# Altium PCB PCB_Dual OPN MegaMod_2021-11-08.pcbdoc
Units mil, origin at the board's own origin, x right, y up, seen from the top; angles counter-clockwise.
Board outline 4675 x 4340 mil, 2 copper layers (Top Layer, Bottom Layer); 73 components, 73 nets, 308 pads, 10 vias.
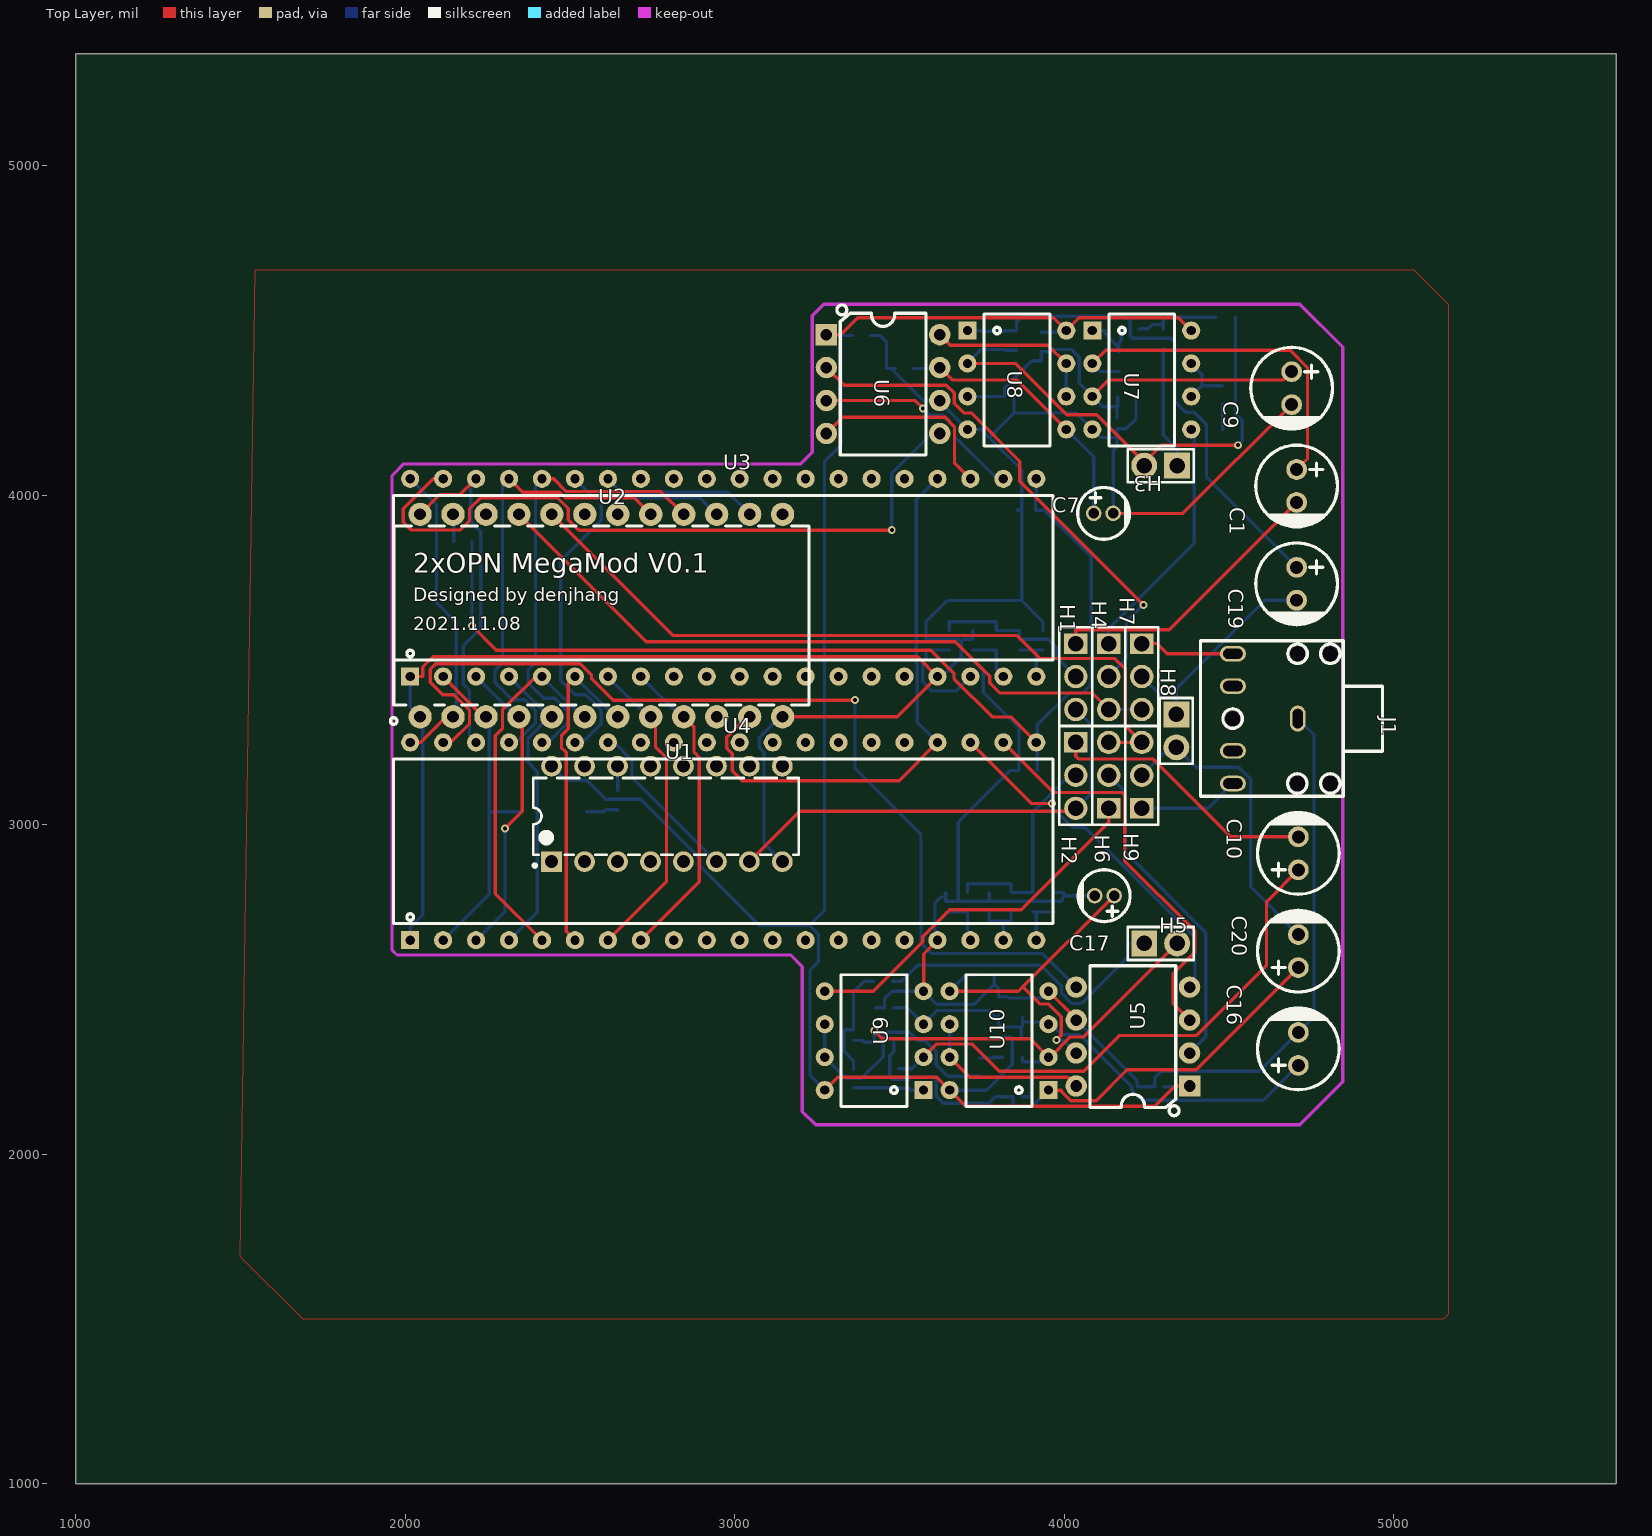
[diagram p0: Top Layer view]
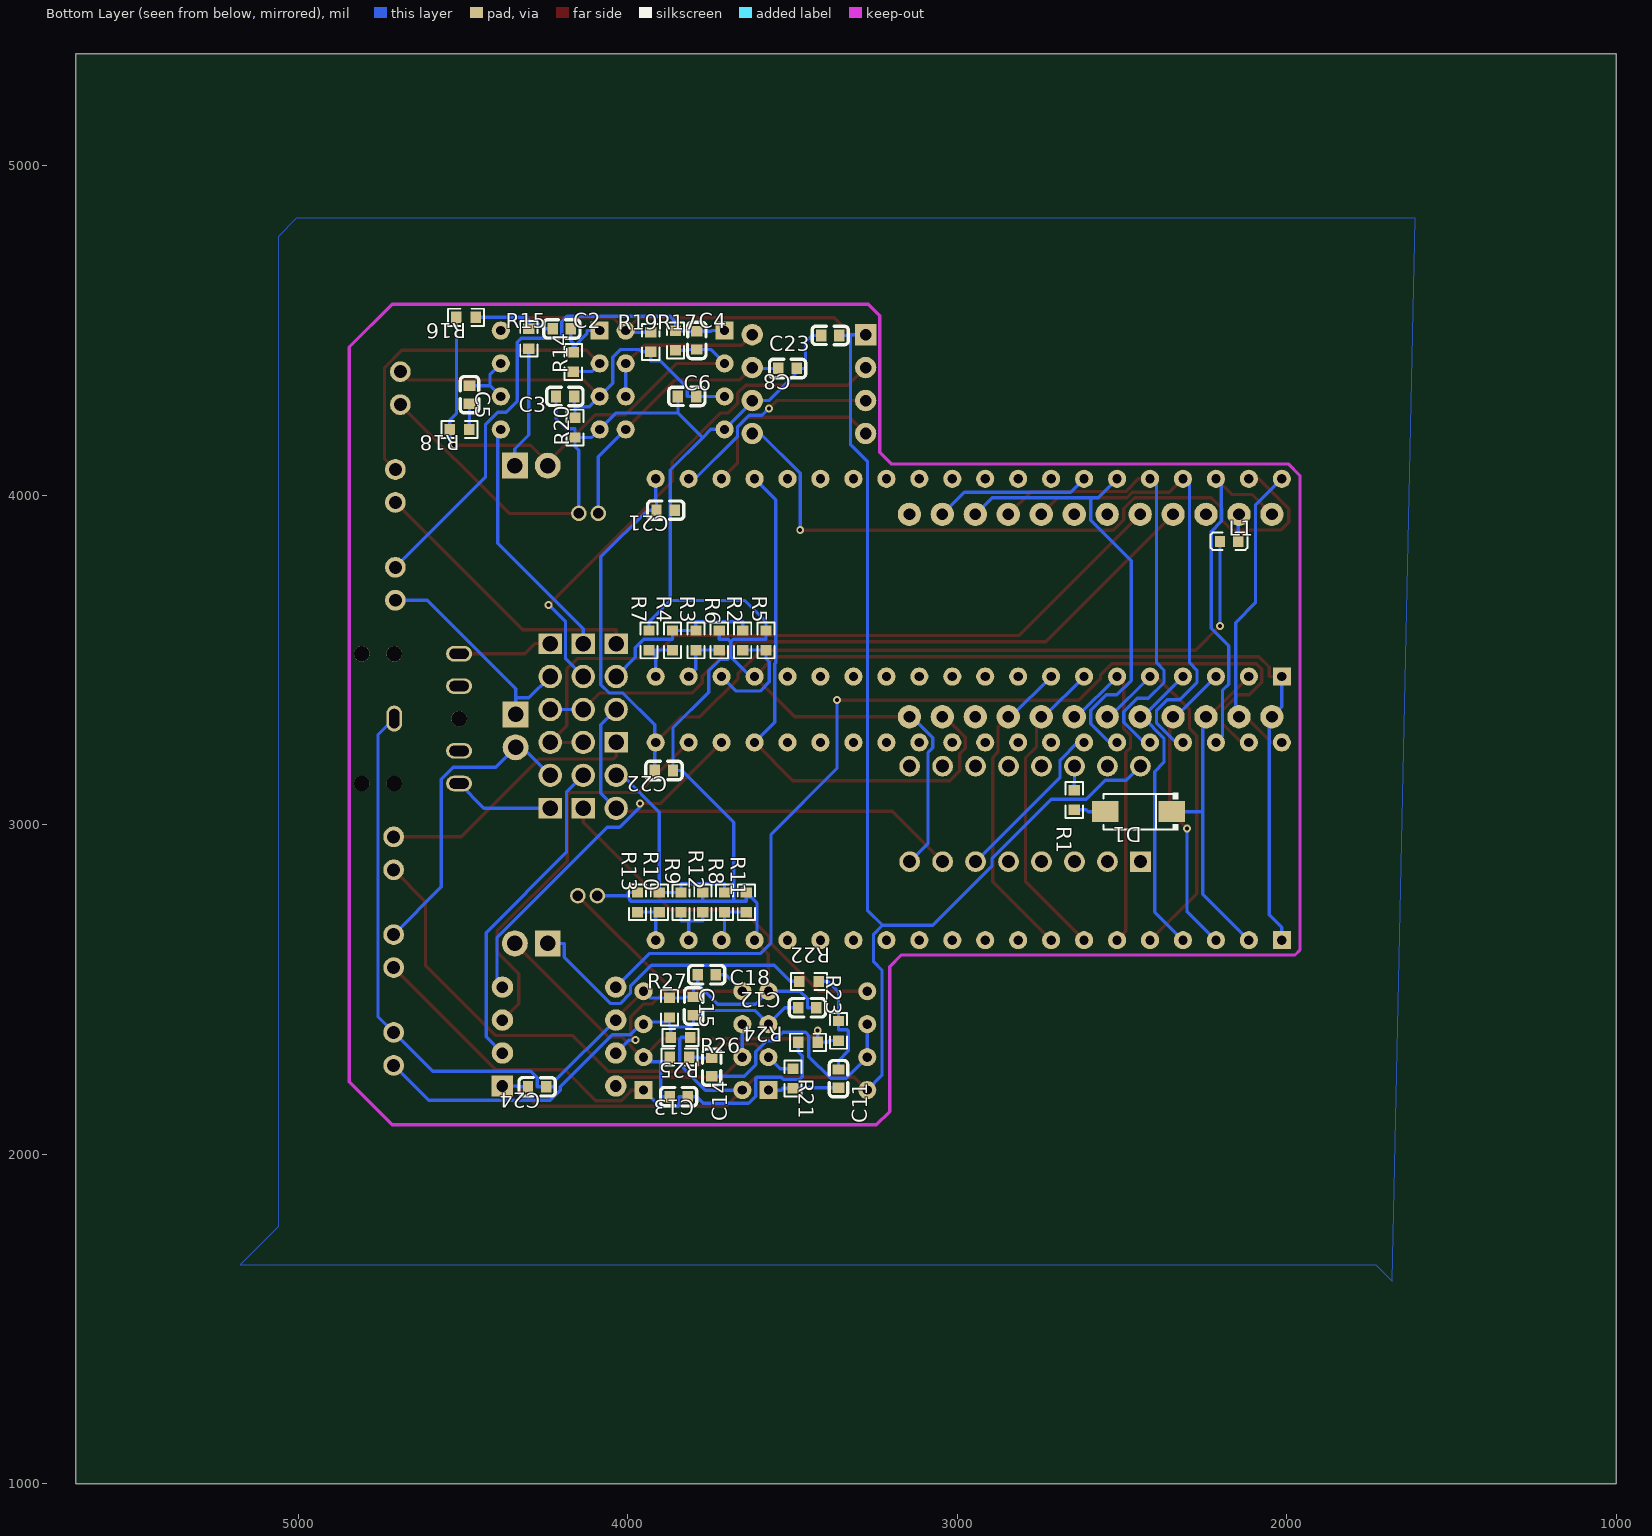
[diagram p1: Bottom Layer view, seen from below]

## Layer stack, top to bottom
Top Layer: signal copper (thickness not stored)
Dielectric: dielectric 12.6, FR-4, Dk 4.8
Bottom Layer: signal copper (thickness not stored)

## Board outline
5675,1000 1000,1000 1000,5340 5675,5340

## Components (designator, comment, footprint, x,y, rotation, side; value= is the part's Value field where it differs from the comment)
C1 "4.7uF" CAP-TH_BD6.3-P2.50-D1.0-FD 4705,4028.24 r270 top
C2 "4.7u" C0603 4200,4505 r180 bottom
C3 "0.1u" C0603 4190,4300 r0 bottom
C4 "10n" C0603 3790,4470 r270 bottom
C5 "4.7u" C0603 4480,4305 r90 bottom
C6 "0.1u" C0603 3820,4300 r0 bottom
C7 "10uF" CAP-TH_BD4.0-P1.50-D0.8-FD 4118.54,3945 r0 top
C8 "0.1u" C0603 3515,4385 r180 bottom
C9 "10uF" CAP-TH_BD6.3-P2.50-D1.0-FD 4690,4325 r270 top
C10 "4.7uF" CAP-TH_BD6.3-P2.50-D1.0-FD 4710,2913.52 r90 top
C11 "4.7u" C0603 3360,2230 r270 bottom
C12 "0.1u" C0603 3455,2445 r180 bottom
C13 "10n" C0603 3845,2175 r0 bottom
C14 "4.7u" C0603 3745,2265 r270 bottom
C15 "0.1u" C0603 3800,2450 r90 bottom
C16 "10uF" CAP-TH_BD6.3-P2.50-D1.0-FD 4710,2320 r90 top
C17 "10uF" CAP-TH_BD4.0-P1.50-D0.8-FD 4121.46,2785 r180 top
C18 "0.1u" C0603 3760,2545 r0 bottom
C19 "4.7uF" CAP-TH_BD6.3-P2.50-D1.0-FD 4705,3731.49 r270 top
C20 "4.7uF" CAP-TH_BD6.3-P2.50-D1.0-FD 4710,2616.76 r90 top
C21 "0.1u" C0603 3885,3955 r180 bottom
C22 "0.1u" C0603 3890,3165 r180 bottom
C23 "0.1u" C0603 3385,4485 r0 bottom
C24 "0.1u" C0603 4275,2205 r180 bottom
D1 "SS14" SMA_L4.4-W2.8-LS5.4-RD 2450,3040 r180 bottom
H1 "Header-Male-2.54_1x3" HDR-TH_3P-P2.54-V-M-1 4035,3450 r270 top
H2 "Header-Male-2.54_1x3" HDR-TH_3P-P2.54-V-M-1 4035,3150 r270 top
H3 "X6511WV-02H-C30D60" HDR-TH_2P-P2.54-V-M 4292.5,4090 r180 top
H4 "Header-Male-2.54_1x3" HDR-TH_3P-P2.54-V-M-1 4135,3450 r270 top
H5 "X6511WV-02H-C30D60" HDR-TH_2P-P2.54-V-M 4292.5,2640 r0 top
H6 "Header-Male-2.54_1x3" HDR-TH_3P-P2.54-V-M-1 4135,3150 r90 top
H7 "Header-Male-2.54_1x3" HDR-TH_3P-P2.54-V-M-1 4235,3450 r270 top
H8 "X6511WV-02H-C30D60" HDR-TH_2P-P2.54-V-M 4340,3285 r270 top
H9 "Header-Male-2.54_1x3" HDR-TH_3P-P2.54-V-M-1 4235,3150 r90 top
J1 "PJ-307C" AUDIO-TH_PJ307C 4610,3322.28 r270 top
L1 "100Ω" L0603 2175,3860 r0 bottom
R1 "1k" R0603 2645,3075 r90 bottom
R2 "10k" R0603 3651,3560 r90 bottom
R3 "10k" R0603 3793,3560 r90 bottom
R4 "10k" R0603 3864,3560 r90 bottom
R5 "1k" R0603 3580,3560 r90 bottom
R6 "1k" R0603 3722,3560 r90 bottom
R7 "1k" R0603 3935,3560 r90 bottom
R8 "10k" R0603 3706,2765 r90 bottom
R9 "10k" R0603 3838,2765 r90 bottom
R10 "10k" R0603 3904,2765 r90 bottom
R11 "1k" R0603 3640,2765 r90 bottom
R12 "1k" R0603 3772,2765 r90 bottom
R13 "1k" R0603 3970,2765 r90 bottom
R14 "3.3k" R0603 4165,4405 r270 bottom
R15 "5.6k" R0603 4300,4475 r90 bottom
R16 "10k" R0603 4490,4540 r180 bottom
R17 "3.6k" R0603 3855,4470 r270 bottom
R18 "3.6k" R0603 4510,4200 r180 bottom
R19 "1k" R0603 3930,4465 r270 bottom
R20 "1k" R0603 4160,4205 r270 bottom
R21 "3.3k" R0603 3498,2230 r90 bottom
R22 "5.6k" R0603 3450,2525 r180 bottom
R23 "10k" R0603 3360,2375 r90 bottom
R24 "3.6k" R0603 3453,2340 r180 bottom
R25 "3.6k" R0603 3843,2295 r180 bottom
R26 "1k" R0603 3840,2355 r0 bottom
R27 "1k" R0603 3873,2445 r90 bottom
U1 "MegaGRRL IC-DCSG" DIP-16_L20.4-W5.8-P2.54-LS7.6-BL 2794.17,3032.99 r0 top
U2 "MegaGRRL IC-FM" DIP-24_L32.0-W13.8-P2.54-LS15.6-BL 2595,3635 r0 top
U3 "YM2203C" DIP40 2965,3750 r0 top
U4 "YM2203C" DIP40 2965,2950 r0 top
U5 "YM3014B" DIP8-2.54-10.9X6.6MM 4208,2357.5 r90 top
U6 "YM3014B" DIP8-2.54-10.9X6.6MM 3450,4337.5 r270 top
U7 "SA5532AP" DIP8 4235,4350 r270 top
U8 "SA5532AP" DIP8 3856,4350 r270 top
U9 "SA5532AP" DIP8 3423,2345 r90 top
U10 "SA5532AP" DIP8 3802,2345 r90 top

## Footprints (in the part's own frame and the unit in brackets; to place one, negate y for a bottom-side part, rotate by r counter-clockwise, add the part's x,y. Pads: shape width x height; smd on the part's side, far side on the other; paste and mask are expansions set on the pad)
AUDIO-TH_PJ307C [mm]
  oval 2x1.2 hole 0.8 slot 1.5 at 0 deg: 1(0,2.5)
  oval 1.2x2 hole 0.8 slot 1.5 at 90 deg: 2(5,-2.5) 3(2.489,-2.5) 4(-2.511,-2.5) 5(-5,-2.5)
  round 1.2 hole 1.2 unplated: ""(-5,2.5) ""(-5,5) ""(0,-2.5) ""(5,2.5) ""(5,5)
  silkscreen extent -6.01,-4.99 5.99,9.03
C0603 [mm]
  rect 0.8x0.9 smd: 1(0.7,0) 2(-0.7,0)
  silkscreen extent -1.39,-0.72 1.41,0.71
CAP-TH_BD4.0-P1.50-D0.8-FD [mm]
  round 1.2 hole 0.8: 1(-0.75,0) 2(0.75,0)
  silkscreen extent -1.98,-2 2.06,2
CAP-TH_BD6.3-P2.50-D1.0-FD [mm]
  round 1.6 hole 1: 1(-1.27,0) 2(1.27,0)
  silkscreen extent -3.15,-3.15 3.17,3.15
DIP8 [mil]
  rect 55x55 hole 28: 1(-150,-150)
  round 55 hole 28: 2(-50,-150) 3(50,-150) 4(150,-150) 5(150,150) 6(50,150) 7(-50,150) 8(-150,150)
  silkscreen extent -200,-100 200,100
DIP8-2.54-10.9X6.6MM [mil]
  rect 65x65 hole 35: 1(-150,-172)
  round 65 hole 35: 2(-50,-172) 3(50,-172) 4(150,-172) 5(150,172) 6(50,172) 7(-50,172) 8(-150,172)
  silkscreen extent -240,-140 215,130
DIP40 [mil]
  rect 55x55 hole 28: 1(-950,-300)
  round 55 hole 28: 2(-850,-300) 3(-750,-300) 4(-650,-300) 5(-550,-300) 6(-450,-300) 7(-350,-300) 8(-250,-300) 9(-150,-300) 10(-50,-300) 11(50,-300) 12(150,-300) 13(250,-300) 14(350,-300) 15(450,-300) 16(550,-300) 17(650,-300) 18(750,-300) 19(850,-300) 20(950,-300) 21(950,300) 22(850,300) 23(750,300) 24(650,300) 25(550,300) 26(450,300) 27(350,300) 28(250,300) 29(150,300) 30(50,300) 31(-50,300) 32(-150,300) 33(-250,300) 34(-350,300) 35(-450,300) 36(-550,300) 37(-650,300) 38(-750,300) 39(-850,300) 40(-950,300)
  silkscreen extent -1000,-250 1000,250
DIP-16_L20.4-W5.8-P2.54-LS7.6-BL [mm]
  rect 1.6x1.6 hole 1: 1(-8.89,-3.68)
  round 1.6 hole 1: 2(-6.35,-3.68) 3(-3.81,-3.68) 4(-1.27,-3.68) 5(1.27,-3.68) 6(3.81,-3.68) 7(6.35,-3.68) 8(8.89,-3.68) 9(8.89,3.68) 10(6.35,3.68) 11(3.81,3.68) 12(1.27,3.68) 13(-1.27,3.68) 14(-3.81,3.68) 15(-6.35,3.68) 16(-8.89,3.68)
  silkscreen extent -10.31,-4.1 10.16,2.77
DIP-24_L32.0-W13.8-P2.54-LS15.6-BL [mm]
  round 1.8 hole 0.9: 1(-13.97,-7.8) 2(-11.43,-7.8) 3(-8.89,-7.8) 4(-6.35,-7.8) 5(-3.81,-7.8) 6(-1.27,-7.8) 7(1.27,-7.8) 8(3.81,-7.8) 9(6.35,-7.8) 10(8.89,-7.8) 11(11.43,-7.8) 12(13.97,-7.8) 13(13.97,7.8) 14(11.43,7.8) 15(8.89,7.8) 16(6.35,7.8) 17(3.81,7.8) 18(1.27,7.8) 19(-1.27,7.8) 20(-3.81,7.8) 21(-6.35,7.8) 22(-8.89,7.8) 23(-11.43,7.8) 24(-13.97,7.8)
  silkscreen extent -16.26,-8.38 16,6.9
HDR-TH_2P-P2.54-V-M [mm]
  rect 2x2 hole 1.2: 1(-1.27,0)
  round 2 hole 1.2: 2(1.27,0)
  silkscreen extent -2.54,-1.27 2.54,1.27
HDR-TH_3P-P2.54-V-M-1 [mm]
  rect 1.575x1.8 hole 1.2: 1(-2.54,0)
  round 1.8 hole 1.2: 2(0,0) 3(2.54,0)
  silkscreen extent -3.81,-1.27 3.81,1.27
L0603 [mm]
  rect 0.8x0.864 smd: 1(-0.7,0) 2(0.7,0)
  silkscreen extent -1.41,-0.67 1.42,0.65
R0603 [mil]
  rect 31.75x34.02 smd: 1(29.66,0) 2(-29.66,0)
  silkscreen extent -55,-26 55,26
SMA_L4.4-W2.8-LS5.4-RD [mm]
  rect 2.046x1.62 smd: 1(2.566,0) 2(-2.565,0)
  silkscreen extent -2.7,-1.44 3.08,1.44

## Via types
v1: diameter 24.02, hole 12.01, Top Layer to Bottom Layer, 10 vias

## Nets (pads, with @x,y where several pads share a name; then routed paths per layer and width w, separated by ;. In a path a pad name is that pad's centre, name@x,y a point inside that pad or via, vN(x,y) a via of type N, cw(c..) or ccw(c..) an arc to the next point about the centre after c; other vN are vias at no path point)
+5V: L1.1 U2.23 | length 83.1
  Bottom Layer w10: U2.23 2147.44,3939.65 L1.1
/CS1: U2.14 U3.34 | length 474.7
  Bottom Layer w10: U3.34 2656.06,4008.94 2978.15,4008.94 U2.14
/CS2: U1.6 U4.34 | length 509.2
  Bottom Layer w10: U4.34 2633.69,3250 2687.83,3195.86 2687.83,3144.45 U1.6
/IC: U2.11 U3.24 U4.24 | length 1740.1
  Top Layer w10: U2.11 3037.92,3327.91 2975.4,3265.39 2975.4,3232.76 2992.54,3215.62 2992.54,3163.99 3022.65,3133.88 3498.88,3133.88 U4.24
  Bottom Layer w10: U4.24 3553.58,3311.42 3553.58,3488.86 3550.94,3491.5 3550.94,3985.94 U3.24
/RD: U2.16 U3.36 U4.36 | length 1407.4
  Top Layer w10: U3.36 2450.39,4050 2488.97,4011.42 2775.67,4011.42 U2.16
  Bottom Layer w10: U4.36 2433.96,3250 2495,3311.04 2495,3343.68 2454.18,3384.5 2419.73,3384.5 2372.54,3431.69 2372.54,3469.61 2395,3492.07 2395,4030 U3.36
/WR: U2.15 U3.35 U4.35 | length 1385
  Bottom Layer w10: U4.35 2538.74,3250 2595,3306.26 2595,3347.23 2547.33,3394.9 2515.26,3394.9 2472.32,3437.84 2472.32,3801.77 2595,3924.45 2595,3992.85 ; U3.35 2572.15,3992.85 2595,3992.85 ; U2.15 2894.24,3992.85 2595,3992.85
A0: U2.17 U3.37 U4.37 | length 1410.9
  Top Layer w10: U3.37 2356.05,4008.95 2468.68,4008.95 2484.77,3992.86 2694.23,3992.86 U2.17
  Bottom Layer w10: U4.37 2336.41,3250 2395,3308.59 2395,3347.23 2362.67,3379.56 2324.67,3379.56 2272.54,3431.69 2272.54,3469.61 2295,3492.07 2295,4030 U3.37
A.VCC: C23.2 C24.2 R19.2 R26.2 U1.16 U5.1 U6.1 U7.8 U8.8 U9.8 U10.8 | length 6298.5
  Top Layer w10: U9.8 3311.76,2233.76 3613.24,2233.76 U10.8 3701.07,2145.93 4274.86,2145.93 4336.43,2207.5 U5.1 ; U6.1 3321.57,4487.5 3372.94,4538.87 3967.13,4538.87 U8.8 4044.58,4538.58 4346.42,4538.58 U7.8
  Bottom Layer w10: U1.16 2486.74,3135.3 2550.67,3135.3 2608.27,3077.7 2714.96,3077.7 2894.19,2898.47 2894.19,2875.12 3074.22,2695.09 3226.74,2695.09 ; U9.8 3228.49,2239.51 3228.49,2559.49 3253.81,2584.81 3253.81,2668.02 3226.74,2695.09 ; U6.1 3321.57,4487.5 3324.07,4485 ; C23.2 3324.07,4485 ; U10.8 3763.92,2195 3842.25,2273.33 3842.25,2350.04 3837.29,2355 R26.2 ; R19.2 4000.66,4494.66 U8.8 ; C24.2 4333.93,2205 4336.43,2207.5 U5.1 ; 3226.74,2695.09 3272.46,2740.81 3272.46,4103.35 3324.07,4154.96 3324.07,4485
C2_2: C2.2 R15.1 R16.1 | length 268.6
  Bottom Layer w10: C2.2 4254.38,4505 4267.51,4518.13 R15.1@4300,4518.13 ; R15.1 R15.1@4300,4518.13 ; R16.1 4308.4,4540 4300,4531.6 R15.1@4300,4518.13
C5_2: C5.2 R18.1 | length 77.6
  Bottom Layer w10: C5.2 4480,4228.43 4480.35,4228.08 R18.1@4480.35,4200
C11_1: C11.1 R21.2 U9.1 | length 216.1
  Bottom Layer w10: C11.1 3467.82,2202.44 3469.92,2200.34 R21.2 3529.09,2200.34 3534.43,2195 U9.1
C13_1: C13.1 H5.2 R23.2 R24.1 R25.2 U10.2 | length 1428.6
  Top Layer w10: v1(3423.34,2375.63) 3447.92,2351.05 3895.95,2351.05 U10.2 3957.27,2295 4018.69,2356.42 4058.92,2356.42 H5.2
  Bottom Layer w10: R23.2 3388.08,2345.34 3393.42,2340 R24.1 v1(3423.34,2375.63) ; C13.1 3899.38,2175 3899.38,2280.96 ; R25.2 3872.66,2280.96 3899.38,2280.96 ; U10.2 3937.96,2280.96 3899.38,2280.96
C14_1: C14.1 U9.6 U9.7 | length 771.5
  Bottom Layer w10: U9.6 U9.7 3337.27,2230.73 3384.41,2230.73 3450.3,2296.62 3450.3,2360.5 3460.11,2370.31 3529.86,2370.31 3556.09,2344.08 3578.63,2344.08 3611.58,2311.13 3611.58,2272.52 3646.66,2237.44 C14.1
C19_2: C19.2 H7.2 H8.1 | length 686.2
  Bottom Layer w10: H7.2 4299.56,3385.44 4340,3385.44 ; H8.1 4340,3385.44 ; C19.2 4608.06,3681.49 4340,3413.43 4340,3385.44
C20_2: C20.2 H8.2 H9.2 | length 937.1
  Bottom Layer w10: H9.2 4320,3235 H8.2 4400.13,3174.87 4528.9,3174.87 4565.29,3138.48 4565.29,2811.47 C20.2
CH-A1: R4.2 R7.2 U3.20 | length 151.3
  Bottom Layer w10: R4.2 3915,3530.34 ; U3.20 3915,3530.34 ; R7.2 3915,3530.34
CH-A2: R10.2 R13.2 U4.20 | length 151.3
  Bottom Layer w10: R10.2 R10.2@3915,2735.34 ; U4.20 R10.2@3915,2735.34 ; R13.2 R10.2@3915,2735.34
CH-B1: R3.2 R6.2 U3.19 | length 160.5
  Bottom Layer w10: R6.2 R3.2 3793,3472 U3.19
CH-B2: R9.2 R12.2 U4.19 | length 178.3
  Bottom Layer w10: R12.2 3772,2708.4 3815,2708.4 ; U4.19 3815,2708.4 ; R9.2 3838,2708.4 3815,2708.4
CH-C1: R2.2 R5.2 U3.18 | length 345.6
  Bottom Layer w10: R2.2 R5.2 3580,3503.4 3570.71,3494.11 3570.71,3433.51 3598.25,3405.97 3670.97,3405.97 U3.18
CH-C2: R8.2 R11.2 U4.18 | length 155.1
  Bottom Layer w10: R11.2 R8.2 3706,2659 U4.18
D0: U2.2 U3.40 U4.40 | length 946.5
  Top Layer w10: U4.40 2046.65,3250 2124.56,3327.91 U2.2
  Bottom Layer w10: U3.40 2095,3970 2095,3673.77 2155,3613.77 2155,3337.91 U2.2
D1: D1.1 U2.3 U3.2 U4.2 | length 1014.6
  Top Layer w10: U3.2 2237.09,3327.91 U2.3
  Bottom Layer w10: U4.2 2255,2790 2255,3040 ; U2.3 2255,3317.91 2255,3040 ; D1.1 2255,3040
D2: U2.4 U3.3 U4.3 | length 920.6
  Top Layer w10: v1(2302.94,2989.28) 2355,3041.34 2355,3317.91 U2.4
  Bottom Layer w10: U4.3 2302.94,2737.94 v1(2302.94,2989.28) ; U3.3 2337.09,3327.91 U2.4
D3: U2.5 U3.4 U4.4 | length 932.1
  Bottom Layer w10: U4.4 2400.36,2735.36 2400.36,3161.5 2372.57,3189.29 2372.57,3263.39 U2.5@2437.09,3327.91 ; U3.4 U2.5@2437.09,3327.91 ; U2.5 U2.5@2437.09,3327.91
D4: U2.6 U3.5 U4.5 | length 1109
  Top Layer w10: U4.5 2273.57,2791.43 2273.57,3270.64 2295,3292.07 2295,3349.17 2395.83,3450 U3.5
  Bottom Layer w10: U3.5 2537.09,3327.91 U2.6
D5: U2.7 U3.6 U4.6 | length 1014.6
  Top Layer w10: U4.6 2488.49,2676.51 2488.49,3219.67 2473.89,3234.27 2473.89,3270.96 2495,3292.07 2495,3430 U3.6
  Bottom Layer w10: U3.6 2637.09,3327.91 U2.7
D6: U2.8 U3.7 U4.7 | length 951.7
  Top Layer w10: U4.7 2792.54,2827.54 2792.54,3204.32 2759.3,3237.56 2759.3,3313.61 U2.8
  Bottom Layer w10: U3.7 2737.09,3327.91 U2.8
D7: U2.9 U3.8 U4.8 | length 951.7
  Top Layer w10: U4.8 2892.54,2827.54 2892.54,3204.32 2876.42,3220.44 2876.42,3296.49 U2.9
  Bottom Layer w10: U3.8 2837.09,3327.91 U2.9
GND: C3.1 C6.1 C7.2 C8.1 C9.2 C12.1 C15.1 C16.2 C17.2 C18.1 C21.1 C22.1 C23.1 C24.1 J1.1 R5.1 R6.1 R7.1 R11.1 R12.1 R13.1 R20.1 R27.1 U1.8 U2.1 U2.12 U3.1 U3.17 U4.1 U4.17 U5.6 U6.6 U7.4 U8.4 U9.4 U10.4 | length 11448.4
  Top Layer w10: U3.1 2053.57,3450 2053.57,3478.93 2084.9,3510.26 3554.74,3510.26 U3.17 3492.91,3327.91 U2.12 ; U9.4 3573,2608 U4.17 ; U10.4 4036,2411 U5.6 ; C7.2 4360,3945 C9.2
  Bottom Layer w10: U4.1 2015,2688.57 2053.57,2727.14 2053.57,3319.34 U2.1 2015,3357.91 U3.1 ; U1.8 3088.49,2943.79 3088.49,3219.67 3073.89,3234.27 3073.89,3263.88 3137.92,3327.91 U2.12 ; C23.1 3439.38,4485 3460.62,4463.76 3460.62,4385 C8.1@3474.03,4385 ; C12.1 3454.26,2445 3454.26,2471.81 3477.45,2495 U9.4 3612.1,2455.9 3727.25,2455.9 3787.56,2516.21 ; C8.1 C8.1@3474.03,4385 ; U4.17 3607.75,2657.25 3607.75,2762.99 3625.95,2781.19 R11.1@3640,2781.19 ; U3.17 3626.34,3450 3687.07,3510.73 ; R11.1 R11.1@3640,2781.19 ; R6.1 3722,3562.71 3695.05,3562.71 3687.07,3554.73 ; R12.1 3772,2767.71 ; C18.1 3787.56,2520.24 3787.56,2516.21 ; C6.1 3847.56,4250 ; C21.1 C21.1@3870.85,3955 ; R7.1 3935,3616.6 3870.85,3680.75 ; U10.4 3931.66,2474.66 R27.1 3831.69,2474.66 3828.79,2477.56 C15.1 3800,2504.38 3799.39,2504.38 3787.56,2516.21 ; R13.1 3998.08,2794.66 3998.08,2788.82 4001.9,2785 ; U5.6 4220.62,2222.88 4220.62,2205 C24.1 4274.26,2205 4274.26,2231.82 4294.24,2251.8 4591.8,2251.8 C16.2 4757.65,2417.65 4757.65,3273.07 J1.1 ; C17.2 4001.9,2785 ; C7.2 4148.07,4136.47 4160,4148.4 R20.1 ; C3.1 4217.56,4232.9 4186.95,4202.29 4160,4202.29 R20.1 ; C8.1@3474.03,4385 3571.53,4287.5 U6.6 3622,4284 U8.4 3747.56,4200 3772.56,4175 ; R11.1@3640,2781.19 3640,2767.71 3677.91,2767.71 ; 3677.91,2767.71 3677.91,3007.29 3835.62,3165 C22.1 3862.44,3293.87 3753.58,3402.73 3753.58,3467.36 3719.25,3501.69 3696.11,3501.69 3687.07,3510.73 ; 3677.91,2767.71 3772,2767.71 ; 3687.07,3510.73 3687.07,3554.73 ; 3687.07,3554.73 3679.09,3562.71 3580,3562.71 3580,3580.21 R5.1 3580,3616.6 3644.15,3680.75 3870.85,3680.75 ; 3772,2767.71 3990.57,2767.71 3993.49,2770.63 3993.49,2775.76 4001.9,2784.17 4001.9,2785 ; 3772.56,4175 3847.56,4250 ; 3772.56,4175 3870.85,4076.71 C21.1@3870.85,3955 ; 3847.56,4250 4035,4250 U7.4 4109.66,4175.34 R20.1 ; 3870.85,3680.75 C21.1@3870.85,3955
H5_1: H5.1 R22.2 | length 943.2
  Bottom Layer w10: R22.2 3506.6,2525 3555.4,2573.8 3927.77,2573.8 3991.5,2510.07 3991.5,2489.14 4023.14,2457.5 4050.78,2457.5 4192.06,2598.78 4192.06,2640 H5.1
IN.L: H4.3 H7.3 U2.21 | length 2146.9
  Top Layer w10: U2.21 2731.37,3555.72 3668.68,3555.72 3773.32,3451.08 3773.32,3431.25 3804.57,3400 4085,3400 H4.3
  Bottom Layer w10: H4.3 H7.3
IN.R: H6.3 H9.3 U2.20 | length 2278
  Top Layer w10: U2.20 2812.64,3574.45 3856.64,3574.45 3926.66,3504.43 4153.6,3504.43 4185,3473.03 4185,3300 H9.3 H6.3
MCLK: U2.24 U3.38 U4.38 | length 1072.4
  Top Layer w10: U2.24 2105.45,4002.54 2167.54,4002.54 U3.38
  Bottom Layer w10: U4.38 2195,3270 2195,3407.93 2176.2,3426.73 2176.2,3542.72 2229.39,3595.91 2229.39,3889.88 2198.49,3920.78 2198.49,4033.49 U3.38
MP1: U6.8 U8.6 U8.7 | length 520.2
  Top Layer w10: U6.8 3653.8,4455.7 3950.3,4455.7 U8.7
  Bottom Layer w10: U8.6 U8.7
MP2: U5.8 U10.6 U10.7 | length 520.2
  Top Layer w10: U10.7 3713.42,2233.58 4009.92,2233.58 U5.8
  Bottom Layer w10: U10.7 U10.6
OPN_OUT1: C4.2 C19.1 R17.2 U8.1 | length 1574.4
  Bottom Layer w10: U8.1 3744.57,4500 3747.01,4497.56 C4.2 3804.4,4497.56 3818.79,4497.56 3820.89,4499.66 R17.2 3855,4526.6 3871.54,4543.14 4184.19,4543.14 4200.01,4527.32 4200.01,4483.43 4207.23,4476.21 4323.42,4476.21 4334.66,4464.97 4334.66,4285.55 4368.3,4251.91 4394.13,4251.91 4431.69,4214.35 4431.69,4054.8 C19.1
OPN_OUT2: C13.2 C20.1 R24.2 U10.1 | length 1659
  Top Layer w10: U10.1 3990.57,2195 3990.57,2191.3 4018.82,2163.05 4096.86,2163.05 4190.23,2256.42 4399.66,2256.42 C20.1
  Bottom Layer w10: R24.2 3482.66,2311.92 3469.91,2299.17 3469.91,2235.63 3478.24,2227.3 3528.07,2227.3 3534.36,2233.59 3608.65,2233.59 3611.58,2230.66 3611.58,2176.44 3633.12,2154.9 3770.52,2154.9 3790.62,2175 C13.2 3844.26,2175 3844.26,2148.18 3846.24,2146.2 3903.2,2146.2 U10.1
OPO1: U3.23 U6.4 | length 599.1
  Top Layer w10: U6.4 3327.08,4236.58 3638.47,4236.58 3666.5,4208.55 3666.5,4098.5 U3.23
OPO2: U4.23 U5.4 | length 1090.1
  Top Layer w10: U4.23 3900.56,3064.44 v1(3962.81,3064.44)
  Bottom Layer w10: v1(3962.81,3064.44) 3962.81,3054.01 4024.6,2992.22 4061.96,2992.22 4396.62,2657.56 4396.62,2524.12 U5.4
OUT.L: H7.1 J1.5 | length 289.4
  Top Layer w10: H7.1 4281.5,3550 4312.36,3519.14 J1.5
OUT.R: H9.1 J1.2 | length 307.8
  Bottom Layer w10: H9.1 4436.14,3050 J1.2
PHIS1: U3.39 U6.5 | length 2182.2
  Top Layer w10: U3.39 2084.94,4050 1993.88,3958.94 1993.88,3918.52 2017.44,3894.96 2166.88,3894.96 2195,3923.08 2195,3959.01 2228.85,3992.86 2462.01,3992.86 2495,3959.87 2495,3926.11 2527.06,3894.05 v1(3476.42,3894.05)
  Bottom Layer w10: v1(3476.42,3894.05) 3476.42,4066.9 3597.02,4187.5 U6.5
PHIS2: U4.39 U5.5 | length 3032.4
  Top Layer w10: U4.39 2138.74,3250 2195,3306.26 2195,3347.23 2147.33,3394.9 2113.52,3394.9 2076.06,3432.36 2076.06,3472.49 2092.17,3488.6 2531.44,3488.6 2565,3455.04 2565,3444.13 2630.78,3378.35 v1(3365.01,3378.35)
  Bottom Layer w10: v1(3365.01,3378.35) 3365.01,3170.89 3565.01,2970.89 3565.01,2641.69 3597.34,2609.36 3934.14,2609.36 U5.5
PSG_SND: H1.3 H2.3 U1.7 | length 1396.4
  Top Layer w10: U1.7 3197.42,3041.36 4026.36,3041.36 H2.3
  Bottom Layer w10: H2.3 4081.51,3096.51 4081.51,3303.49 H1.3
R1_2: D1.2 R1.2 | length 96.2
  Bottom Layer w10: D1.2 2602.35,3040 2607.69,3045.34 R1.2
R2_1: H1.2 R2.1 R3.1 R4.1 | length 528.6
  Bottom Layer w10: R2.1 3651,3616.6 3793,3616.6 R3.1 R4.1 3864,3562.71 3951.4,3562.71 3977.08,3537.03 3977.08,3507.92 H1.2
R10_1: H2.2 R8.1 R9.1 R10.1 | length 672.8
  Bottom Layer w10: R8.1 3706,2821.6 3838,2821.6 R9.1 R10.1 3904,3038.27 4015.73,3150 H2.2
R15_2: H3.1 R15.2 | length 372.9
  Bottom Layer w10: R15.2 4300,4182.94 4342.5,4140.44 H3.1
R16_2: C4.1 H3.2 R16.2 R17.1 R18.2 U8.2 | length 1545.4
  Top Layer w10: U8.2 3851.44,4400 4007.14,4244.3 4097.77,4244.3 H3.2@4242.5,4099.57 ; H3.2 H3.2@4242.5,4099.57 ; v1(4526.51,4151.95) 4294.88,4151.95 H3.2@4242.5,4099.57
  Bottom Layer w10: U8.2 3748.44,4442.44 C4.1 3804.4,4442.44 3818.79,4442.44 3820.89,4440.34 R17.1 ; R16.2 4519.66,4248.08 4539.66,4228.08 4539.66,4214.04 R18.2 4539.66,4165.1 v1(4526.51,4151.95)
R21_1: C10.1 R21.1 U9.2 | length 1644.6
  Top Layer w10: U9.2 3612.96,2334.96 3719.05,2334.96 3802.21,2251.8 4058.86,2251.8 4168.06,2361 4401.35,2361 4613.63,2573.28 4613.63,2767.15 C10.1
  Bottom Layer w10: R21.1 3537.66,2259.66 U9.2
R22_1: C11.2 R22.1 R23.1 | length 348.4
  Bottom Layer w10: C11.2 3360,2284.38 3330.52,2313.86 3330.52,2375.18 3333.05,2377.71 3360,2377.71 R23.1 3360,2491.6 3393.4,2525 R22.1
R25_1: C14.2 R25.1 | length 69.4
  Bottom Layer w10: C14.2 3783.96,2292.56 3786.4,2295 R25.1@3813.35,2295
RB1: C7.1 C8.2 U6.7 U8.5 | length 831.5
  Top Layer w10: U6.7 3659.5,4350 3856,4350 U8.5
  Bottom Layer w10: C8.2 3619.5,4385 U6.7 ; U8.5 4089.01,4116.99 C7.1
RB2: C17.1 C18.2 U5.7 U10.5 | length 1027.3
  Top Layer w10: U10.5 3860.99,2495 3874,2508.01 ; v1(3976.18,2346.56) 3990.63,2361.01 3990.63,2417.41 3951.62,2456.42 3925.59,2456.42 3874,2508.01 ; C17.1 3874,2508.01
  Bottom Layer w10: U10.5 3702,2545 C18.2 ; v1(3976.18,2346.56) 3996.94,2346.56 U5.7
S$5154: 
S$5156: 
S$5159: 
SH1: U3.22 U6.3 | length 652.3
  Top Layer w10: U6.3 3547.67,4287.5 v1(3571.54,4263.63)
  Bottom Layer w10: v1(3571.54,4263.63) 3592.38,4242.79 3631.74,4242.79 3666.5,4208.03 3666.5,4179.22 3795.72,4050 U3.22
SH2: U4.22 U5.3 | length 1252.4
  Top Layer w10: U4.22 3967.21,3097.79 4175.81,3097.79 4183.34,3090.26 4183.34,2890.06 4395.38,2678.02 4395.38,2612.6 4330.63,2547.85 4330.63,2456.87 U5.3
SSG1: C1.2 H1.1 | length 872
  Top Layer w10: H1.1 4035,3592.07 4318.83,3592.07 C1.2
SSG2: C10.2 H2.1 | length 818.3
  Top Layer w10: H2.1 4035,3207.93 4042.93,3200 4268.01,3200 4504.49,2963.52 C10.2
TOBUF1: H4.2 U6.2 | length 1574.9
  Top Layer w10: U6.2 3331.6,4333.9 3642.37,4333.9 3665.58,4310.69 3665.58,4279.38 3694.96,4250 3717.52,4250 3865,4102.52 3865,4042.89 v1(4240.22,3667.67)
  Bottom Layer w10: H4.2 4188.49,3503.49 4188.49,3615.94 v1(4240.22,3667.67)
TOBUF2: H6.2 U5.2 | length 984.9
  Bottom Layer w10: H6.2 4185.69,3099.31 4185.69,2916.86 4429.37,2673.18 4429.37,2356.87 U5.2
U1_14: R1.1 U1.14 | length 73.6
  Bottom Layer w10: U1.14 2644.17,3132.43 2645,3131.6 R1.1@2645,3104.65
U7_1: C2.1 R14.2 U7.1 | length 181
  Bottom Layer w10: U7.1 4123.57,4500 4123.57,4489.56 R14.2@4165,4448.13 ; R14.2 R14.2@4165,4448.13 ; C2.1 4172.44,4469.04 4165,4461.6 R14.2@4165,4448.13
U7_2: C1.1 R14.1 U7.2 | length 1104.7
  Top Layer w10: U7.2 4125.27,4440.27 4685.23,4440.27 4737.97,4387.53 4737.97,4111.21 C1.1
  Bottom Layer w10: U7.2 4109.66,4375.34 R14.1
U7_5: H4.1 U7.5 | length 761.6
  Bottom Layer w10: H4.1 4135,3592.07 4135,3595.09 4394.67,3854.76 4394.67,4190.33 U7.5
U7_6: C5.1 U7.6 U7.7 | length 189.4
  Bottom Layer w10: U7.6 4417.55,4332.55 ; U7.7 4417.55,4367.45 4417.55,4332.55 ; C5.1 4417.55,4332.55
U9_5: H6.1 U9.5 | length 1125.1
  Top Layer w10: U9.5 3420.08,2495 3570.71,2645.63 3570.71,2660.27 3652.37,2741.93 3869,2741.93 4135,3007.93 H6.1
VCC: C21.2 C22.2 L1.2 U3.21 U4.21 | length 3191.3
  Top Layer w10: v1(2202.56,3603.59) 2276.42,3529.73 3594.78,3529.73 3665,3459.51 3665,3443.77 3781.46,3327.31 3837.69,3327.31 U4.21
  Bottom Layer w10: v1(2202.56,3603.59) L1.2 ; U4.21 U4.21@3917.56,3250 ; U3.21 3915,3986.23 3912.56,3983.79 C21.2 3939.38,3955 4081.51,3812.87 4081.51,3425.19 4056.32,3400 4014.31,3400 3917.56,3303.25 U4.21@3917.56,3250 ; C22.2 U4.21@3917.56,3250
VREF1: C3.2 C6.2 C9.1 R19.1 R20.2 U7.3 U8.3 | length 1365.4
  Top Layer w10: U7.3 4135,4350 4665,4350 C9.1
  Bottom Layer w10: U8.3 C6.2 3805.85,4300 3819.26,4300 3819.26,4326.82 3900.84,4408.4 3930,4408.4 3930,4432.93 R19.1 3958.08,4435.34 3964.95,4442.21 4022.64,4442.21 4045.51,4419.34 4045.51,4339.49 U7.3 4116.23,4268.77 4160,4268.77 ; R20.2 4160,4268.77 ; C3.2 4162.44,4271.21 4160,4268.77
VREF2: C12.2 C15.2 C16.1 R26.1 R27.2 U9.3 U10.3 | length 1515.6
  Bottom Layer w10: C12.2 3523,2445 U9.3 3614.61,2436.61 3772.42,2436.61 C15.2@3800,2409.03 ; C15.2 C15.2@3800,2409.03 ; R26.1 3869.66,2386.73 ; R27.2 R27.2@3873,2401.87 ; C16.1 4603.92,2163.92 4234.94,2163.92 4204.52,2194.34 4204.52,2205.27 4046.59,2363.2 3992.19,2363.2 3960.39,2395 U10.3 3945.13,2401.87 R27.2@3873,2401.87 ; C15.2@3800,2409.03 3800,2395.62 3808.89,2386.73 3869.66,2386.73 ; 3869.66,2386.73 3871.33,2386.73 3873,2388.4 R27.2@3873,2401.87
pads on no net: J1. J1.3 J1.4 U1.1 U1.2 U1.3 U1.4 U1.5 U1.9 U1.10 U1.11 U1.12 U1.13 U1.15 U2.10 U2.13 U2.18 U2.19 U2.22 U3.9 U3.10 U3.11 U3.12 U3.13 U3.14 U3.15 U3.16 U3.25 U3.26 U3.27 U3.28 U3.29 U3.30 U3.31 U3.32 U3.33 U4.9 U4.10 U4.11 U4.12 U4.13 U4.14 U4.15 U4.16 U4.25 U4.26 U4.27 U4.28 U4.29 U4.30 U4.31 U4.32 U4.33

## Polygon pours and split planes (outlines as drawn)
GND on Bottom Layer (solid): 1610,4840 5005,4840 5060,4785 5060,1780 5175,1665 1730,1665 1680,1615
GND on Top Layer (solid): 1545,4685 5060,4685 5165,4580 5165,1515 5150,1500 1690,1500 1500,1690

## Silkscreen, mask and mechanical layers (free items; w line width, h text height)
Top Overlay:
  text "2xOPN MegaMod V0.1" at 2025,3765.47 h59.05
  text "Designed by denjhang" at 2025,3678.84 h40.63
  text "2021.11.08" at 2025,3589.68 h40.63